# Altium PCB Monitor_Board.PcbDoc (part 5 of 5)
Units mil, origin at the board's own origin, x right, y up, seen from the top; angles counter-clockwise.
Board outline 3921.03 x 2556.03 mil, 4 copper layers (Top Layer, GND02, PWR03, Bottom Layer), stack 23.756 mil thick; 93 components, 142 nets, 522 pads, 264 vias.
Unrouted connection lines stored in the file: 39.
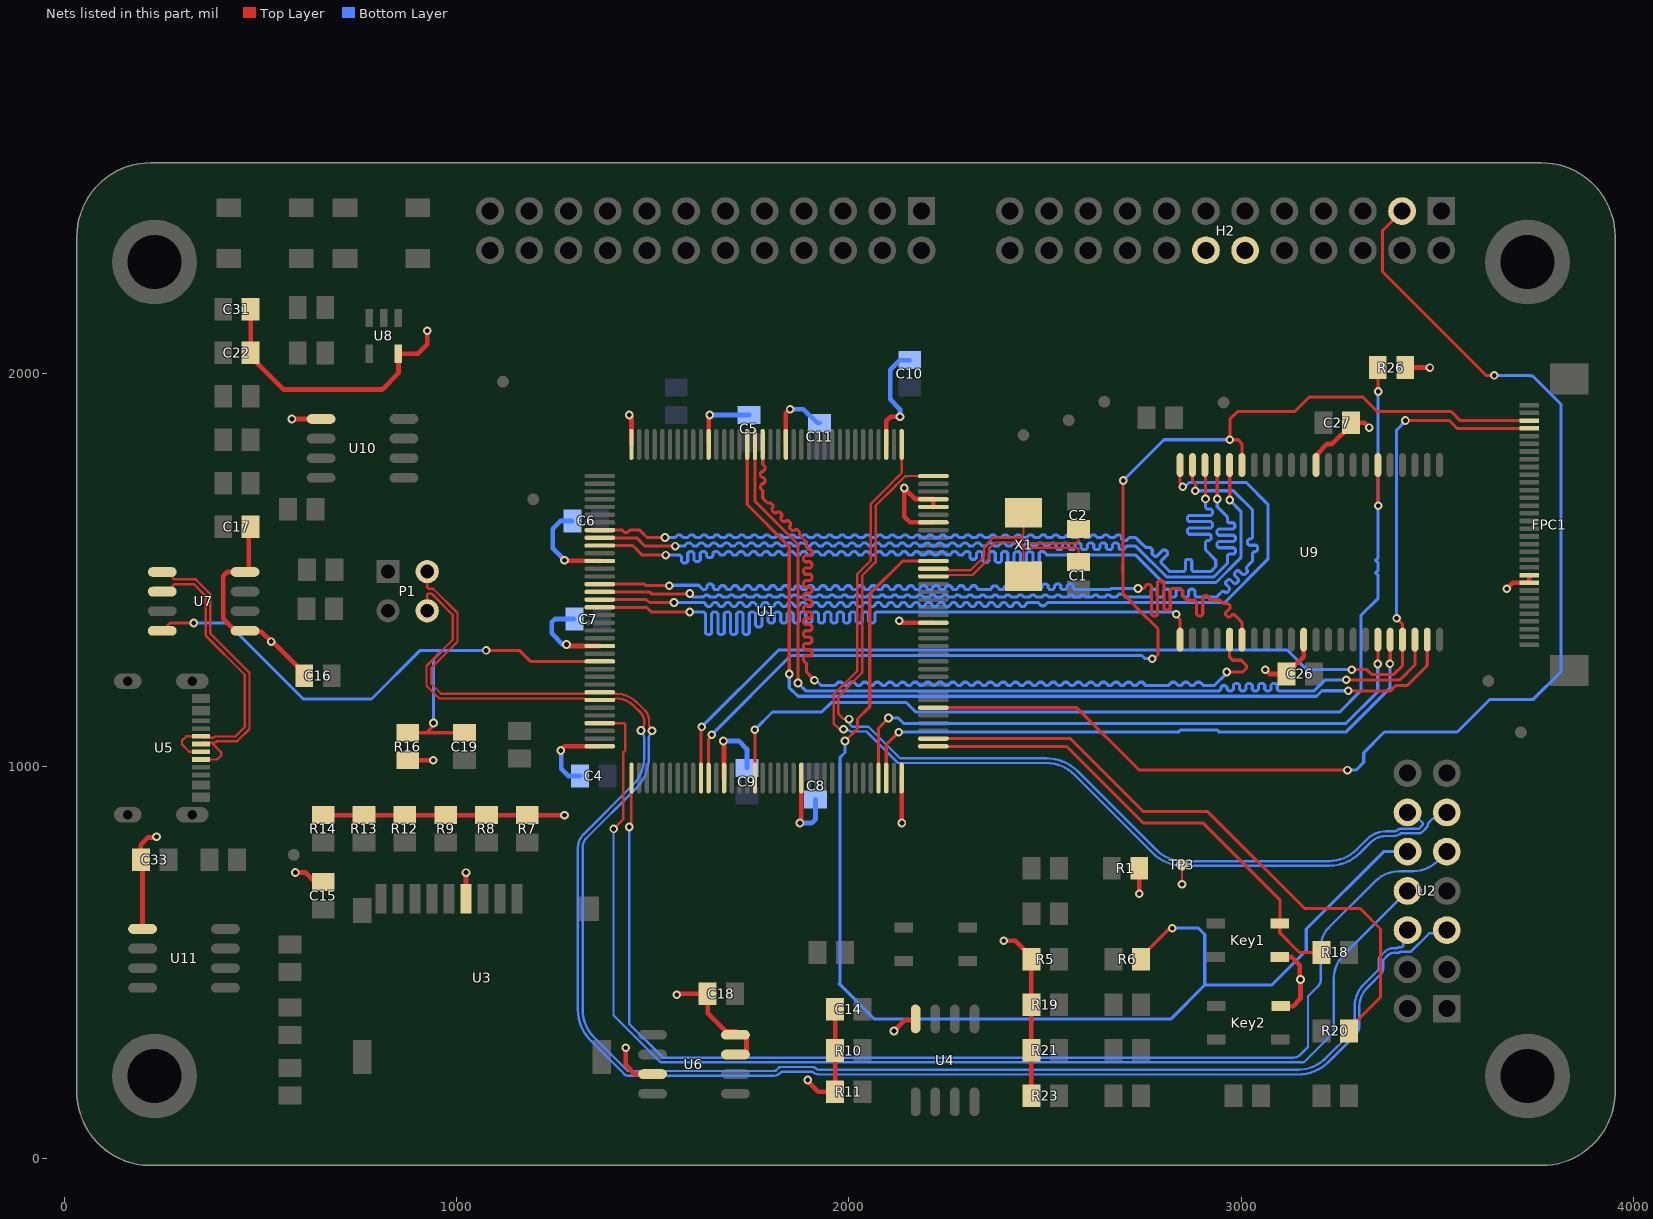
[diagram p6: the nets of this part, all layers, seen from the top]

## Via types
v1: diameter 22, hole 12, Top Layer to Bottom Layer, tented both sides, 259 vias
v2: diameter 45, hole 25, Top Layer to Bottom Layer, tented both sides, 4 vias
v3: diameter 22/22 (per signal layer), hole 12, Top Layer to Bottom Layer, tented both sides, 1 vias

## Nets (pads, with @x,y where several pads share a name; then routed paths per layer and width w, separated by ;. In a path a pad name is that pad's centre, name@x,y a point inside that pad or via, vN(x,y) a via of type N, cw(c..) or ccw(c..) an arc to the next point about the centre after c; other vN are vias at no path point) (continued)
SRAM_A9: U1.55 U9.27 | length 2443.5
  Top Layer w8: U1.55@1780.16,1820.2 1780.16,1775.76 1780.16,1769.45 1781.84,1767.76 1785.84,1763.76 1785.84,1755.76 1781.84,1751.76 1780.16,1751.76 1778.47,1751.76 1774.47,1747.76 1774.47,1739.76 1778.47,1735.76 1780.16,1735.76 1781.84,1735.76 1785.84,1731.76 1785.84,1723.76 1781.84,1719.76 1780.16,1719.76 1778.47,1719.76 1774.47,1715.76 1774.47,1707.76 1778.47,1703.76 1780.16,1702.07 1780.16,1687.76 1780.16,1683.16 1783.16,1680.16 1788,1675.32 1792.47,1670.86 1794.85,1670.86 1800.5,1670.86 1806.16,1665.2 1806.16,1659.54 1804.97,1658.35 1803.77,1657.16 1803.77,1651.5 1809.43,1645.84 1815.09,1645.84 1816.28,1647.04 1817.47,1648.23 1823.13,1648.23 1828.79,1642.57 1828.79,1636.92 1827.6,1635.73 1826.4,1634.53 1826.4,1628.87 1832.06,1623.22 1837.72,1623.22 1838.91,1624.41 1840.1,1625.6 1845.76,1625.6 1851.41,1619.95 1851.41,1614.29 1850.23,1613.1 1849.03,1611.9 1849.03,1606.25 1854.69,1600.59 1860.34,1600.59 1861.54,1601.79 1862.73,1602.97 1868.39,1602.97 1874.04,1597.32 1874.04,1591.66 1874.04,1589.28 1884.17,1579.16 1892,1571.32 1892,1569 1892,1561 1892,1557 1896,1553 1901.5,1553 1905.5,1549 1905.5,1541 1901.5,1537 1892,1537 1888,1537 1884,1533 1884,1525 1888,1521 1892,1521 1901.5,1521 1905.5,1517 1905.5,1509 1901.5,1505 1892,1505 1888,1505 1884,1501 1884,1493 1888,1489 1892,1489 1901.5,1489 1905.5,1485 1905.5,1477 1901.5,1473 1892,1473 1888,1473 1884,1469 1884,1461 1888,1457 1892,1457 1901.5,1457 1905.5,1453 1905.5,1445 1901.5,1441 1892,1441 1888,1441 1884,1437 1884,1429 1888,1425 1892,1425 1901.5,1425 1905.5,1421 1905.5,1413 1901.5,1409 1892,1409 1888,1409 1884,1405 1884,1397 1888,1393 1892,1393 1901.5,1393 1905.5,1389 1905.5,1381 1901.5,1377 1892,1377 1888,1377 1884,1373 1884,1365 1888,1361 1892,1361 1901.5,1361 1905.5,1357 1905.5,1349 1901.5,1345 1892,1345 1888,1345 1884,1341 1884,1333 1888,1329 1892,1329 1901.5,1329 1905.5,1325 1905.5,1317 1901.5,1313 1892,1313 1888,1313 1884,1309 1884,1301 1888,1297 1892,1297 1901.5,1297 1905.5,1293 1905.5,1285 1901.5,1281 1892,1281 1888,1281 1884,1277 1884,1269 1888,1265 1892,1261 1892,1249 1892,1246 1892,1239 v1(1912,1219) ; v1(2963,1240) 3004,1240 3013,1249 3013,1257 3000,1270 2978,1270 2970.28,1277.72 U9.27@2970.28,1322.34
  Bottom Layer w8: v1(1912,1219) 1915.79,1219 1928.79,1206 1936.79,1206 1952.79,1206 1964.79,1206 1968.79,1210 1972.79,1214 1980.79,1214 1984.79,1210 1988.79,1206 1996.79,1206 2000.79,1210 2004.79,1214 2012.79,1214 2016.79,1210 2020.79,1206 2028.79,1206 2032.79,1210 2036.79,1214 2044.79,1214 2048.79,1210 2052.79,1206 2060.79,1206 2064.79,1210 2068.79,1214 2076.79,1214 2080.79,1210 2084.79,1206 2092.79,1206 2096.79,1210 2100.79,1214 2108.79,1214 2112.79,1210 2116.79,1206 2124.79,1206 2128.79,1210 2132.79,1214 2140.79,1214 2144.79,1210 2148.79,1206 2156.79,1206 2160.79,1210 2164.79,1214 2172.79,1214 2176.79,1210 2180.79,1206 2188.79,1206 2192.79,1210 2196.79,1214 2204.79,1214 2208.79,1210 2212.79,1206 2220.79,1206 2224.79,1210 2228.79,1214 2236.79,1214 2240.79,1210 2244.79,1206 2252.79,1206 2256.79,1210 2260.79,1214 2268.79,1214 2272.79,1210 2276.79,1206 2284.79,1206 2288.79,1210 2292.79,1214 2300.79,1214 2304.79,1210 2308.79,1206 2316.79,1206 2320.79,1210 2324.79,1214 2332.79,1214 2336.79,1210 2340.79,1206 2348.79,1206 2352.79,1210 2356.79,1214 2364.79,1214 2368.79,1210 2372.79,1206 2380.79,1206 2384.79,1210 2388.79,1214 2396.79,1214 2400.79,1210 2404.79,1206 2412.79,1206 2416.79,1210 2420.79,1214 2428.79,1214 2432.79,1210 2436.79,1206 2444.79,1206 2448.79,1210 2452.79,1214 2460.79,1214 2464.79,1210 2468.79,1206 2476.79,1206 2480.79,1210 2484.79,1214 2492.79,1214 2496.79,1210 2500.79,1206 2508.79,1206 2512.79,1210 2516.79,1214 2524.79,1214 2528.79,1210 2532.79,1206 2540.79,1206 2544.79,1210 2548.79,1214 2556.79,1214 2560.79,1210 2564.79,1206 2572.79,1206 2576.79,1210 2580.79,1214 2588.79,1214 2592.79,1210 2596.79,1206 2604.79,1206 2608.79,1210 2612.79,1214 2620.79,1214 2624.79,1210 2628.79,1206 2636.79,1206 2640.79,1210 2644.79,1214 2652.79,1214 2656.79,1210 2660.79,1206 2668.79,1206 2672.79,1210 2676.79,1214 2684.79,1214 2688.79,1210 2692.79,1206 2700.79,1206 2704.79,1210 2708.79,1214 2716.79,1214 2720.79,1210 2724.79,1206 2732.79,1206 2736.79,1210 2740.79,1214 2748.79,1214 2752.79,1210 2752.79,1208.21 2755,1206 2767,1206 2775,1206 2779,1206 2787,1206 2803,1206 2815,1206 2819,1210 2823,1214 2831,1214 2835,1210 2839,1206 2847,1206 2851,1210 2855,1214 2863,1214 2867,1210 2871,1206 2879,1206 2883,1210 2887,1214 2895,1214 2899,1210 2903,1206 2915,1206 2928,1206 2932,1206 2963,1237 v1(2963,1240) ; v1@1913.68,1212.32 v1@1916.18,1214.82
SRAM_A10: U1.56 U9.42 | length 2455.3
  Top Layer w8: U1.56@1760.47,1820.2 1760.47,1675.01 1870,1565.48 v1(1870,1212) ; v1(3268,1220) 3404.8,1220 3419.22,1234.42 3424.87,1240.08 ; 3424.88,1240.08 3442.72,1257.92 U9.42@3442.72,1322.34
  Bottom Layer w8: v1(1870,1212) 1890,1192 2940,1192 2944,1192 2948,1196 2948,1200.95 2952,1204.95 2960,1204.95 2964,1200.95 2964,1196 2968,1192 2976,1192 2980,1196 2980,1206.74 2984,1210.74 2992,1210.74 2996,1206.74 2996,1196 3000,1192 3008,1192 3012,1196 3012,1206.74 3016,1210.74 3024,1210.74 3028,1206.74 3028,1196 3032,1192 3040,1192 3044,1196 3044,1206.74 3048,1210.74 3056,1210.74 3060,1206.74 3060,1196 3064,1192 3072,1192 3076,1196 3076,1206.74 3080,1210.74 3088,1210.74 3092,1206.74 3092,1196 3096,1192 3100.6,1192 3186,1192 3214,1220 v1(3268,1220)
SRAM_A11: U1.57 U9.43 | length 2403.4
  Top Layer w8: U1.57@1740.79,1820.2 1740.79,1666.86 1848,1559.65 v1(1848,1235) ; v1@3272.5,1195.5 v1@3276,1192 ; v1(3273,1192) v1@3276,1192 ; U9.43@3474.21,1322.34 3474.21,1256.51 3423.7,1206 3394.7,1206 3380.7,1192 v1@3276,1192
  Bottom Layer w8: v1(1848,1235) 1848,1200 1870,1178 3191.8,1178 3205.97,1192.18 3272.82,1192.18 v1(3273,1192)
SRAM_A12: U1.87 U9.28 | length 2475
  Top Layer w8: U1.87@1364.8,1463.9 1478.32,1463.9 1481.64,1460.58 1542,1460.58 v1(1542,1460) ; v1(2737,1453) 2747,1453 2751,1453 2755,1457 2755,1459.11 2759,1463.11 2767,1463.11 2771,1459.11 2771,1453 2771,1386.8 2775,1382.8 2783,1382.8 2787,1386.8 2787,1453 2787,1468.6 2791,1472.6 2799,1472.6 2803,1468.6 2803,1453 2803,1401.69 2807,1397.69 2815,1397.69 2819,1401.69 2819,1449 2823,1453 2835,1453 2836,1453 2843.8,1453 2852,1444.8 2852,1433 2862,1423 2870,1423 2882,1423 2886,1419 2886,1386.78 2890,1382.78 2898,1382.78 2902,1386.78 2902,1423 2902,1430.8 2906,1434.8 2914,1434.8 2918,1430.8 2918,1427 2922,1423 2934,1423 2937,1423 2945.77,1423 2951.77,1417 2954.6,1414.17 2960.26,1414.17 2965.91,1414.17 2971.57,1408.51 2971.57,1402.86 2968.74,1400.03 2960.07,1391.36 2960.07,1385.7 2965.73,1380.05 2971.39,1380.05 2977.23,1385.89 2982.88,1385.89 2990.39,1378.39 3001.77,1367 U9.28@3001.77,1322.34
  Bottom Layer w8: v1(1542,1460) 1543,1461 1617,1461 1629,1449 1630,1450 1634,1450 1638,1454 1638,1460 1642,1464 1650,1464 1654,1460 1654,1454 1658,1450 1666,1450 1670,1454 1670,1455.9 1674,1459.9 1682,1459.9 1686,1455.9 1686,1454 1690,1450 1698,1450 1702,1454 1702,1455.9 1706,1459.9 1714,1459.9 1718,1455.9 1718,1454 1722,1450 1730,1450 1734,1454 1734,1455.9 1738,1459.9 1746,1459.9 1750,1455.9 1750,1454 1754,1450 1762,1450 1766,1454 1766,1455.9 1770,1459.9 1778,1459.9 1782,1455.9 1782,1454 1786,1450 1794,1450 1798,1454 1798,1455.9 1802,1459.9 1810,1459.9 1814,1455.9 1814,1454 1818,1450 1826,1450 1830,1454 1830,1455.9 1834,1459.9 1842,1459.9 1846,1455.9 1846,1454 1850,1450 1858,1450 1862,1454 1862,1455.9 1866,1459.9 1874,1459.9 1878,1455.9 1878,1454 1882,1450 1890,1450 1894,1454 1894,1455.9 1898,1459.9 1906,1459.9 1910,1455.9 1910,1454 1914,1450 1922,1450 1926,1454 1926,1455.9 1930,1459.9 1938,1459.9 1942,1455.9 1942,1454 1946,1450 1954,1450 1958,1454 1958,1455.9 1962,1459.9 1970,1459.9 1974,1455.9 1974,1454 1978,1450 1986,1450 1990,1454 1990,1455.9 1994,1459.9 2002,1459.9 2006,1455.9 2006,1454 2010,1450 2018,1450 2022,1454 2022,1455.9 2026,1459.9 2034,1459.9 2038,1455.9 2038,1454 2042,1450 2050,1450 2054,1454 2054,1455.9 2058,1459.9 2066,1459.9 2070,1455.9 2070,1454 2074,1450 2082,1450 2086,1454 2086,1455.9 2090,1459.9 2098,1459.9 2102,1455.9 2102,1454 2106,1450 2114,1450 2118,1454 2118,1455.9 2122,1459.9 2130,1459.9 2134,1455.9 2134,1454 2138,1450 2146,1450 2150,1454 2150,1455.9 2154,1459.9 2162,1459.9 2166,1455.9 2166,1454 2170,1450 2178,1450 2182,1454 2182,1455.9 2186,1459.9 2194,1459.9 2198,1455.9 2198,1454 2202,1450 2210,1450 2214,1454 2214,1455.9 2218,1459.9 2226,1459.9 2230,1455.9 2230,1454 2234,1450 2242,1450 2246,1454 2246,1455.9 2250,1459.9 2258,1459.9 2262,1455.9 2262,1454 2266,1450 2274,1450 2278,1454 2278,1455.9 2282,1459.9 2290,1459.9 2294,1455.9 2294,1454 2298,1450 2306,1450 2310,1454 2310,1455.9 2314,1459.9 2322,1459.9 2326,1455.9 2326,1454 2330,1450 2342,1450 2356,1450 2360,1450 2364,1454 2364,1455.57 2368,1459.57 2376,1459.57 2380,1455.57 2380,1454 2384,1450 2392,1450 2396,1454 2396,1455.57 2400,1459.57 2408,1459.57 2412,1455.57 2412,1454 2416,1450 2424,1450 2428,1454 2428,1455.57 2432,1459.57 2440,1459.57 2444,1455.57 2444,1454 2448,1450 2456,1450 2460,1454 2460,1455.57 2464,1459.57 2472,1459.57 2476,1455.57 2476,1454 2480,1450 2488,1450 2492,1454 2492,1460 2496,1464 2504,1464 2508,1460 2508,1454 2512,1450 2520,1450 2524,1454 2524,1460 2528,1464 2536,1464 2540,1460 2540,1454 2544,1450 2552,1450 2556,1454 2556,1460 2560,1464 2568,1464 2572,1460 2572,1454 2576,1450 2588,1450 2604,1450 2618,1450 2665,1450 2668,1453 v1@2735,1453
SRAM_A13: U1.88 U9.21 | length 2457.2
  Top Layer w8: U1.88@1364.8,1444.21 1491,1444.21 1496.21,1439 1593,1439 v1(1594,1440) ; U9.21@2875.79,1767.66 2874.9,1766.76 2875.79,1765.87 2875.79,1728.21 2883,1721 v1(2883,1702)
  Bottom Layer w8: v1(1594,1440) 1603,1431 1621,1431 1628.42,1431 1629,1431.58 1633,1435.58 1641,1435.58 1645,1431.58 1645.58,1431 1660,1431 1661,1432 1665,1436 1673,1436 1677,1432 1678,1431 1692,1431 1693,1432 1697,1436 1705,1436 1709,1432 1710,1431 1724,1431 1725,1432 1729,1436 1737,1436 1741,1432 1742,1431 1756,1431 1757,1432 1761,1436 1769,1436 1773,1432 1774,1431 1788,1431 1789,1432 1793,1436 1801,1436 1805,1432 1806,1431 1820,1431 1821,1432 1825,1436 1833,1436 1837,1432 1838,1431 1852,1431 1853,1432 1857,1436 1865,1436 1869,1432 1870,1431 1884,1431 1885,1432 1889,1436 1897,1436 1901,1432 1902,1431 1916,1431 1917,1432 1921,1436 1929,1436 1933,1432 1934,1431 1948,1431 1949,1432 1953,1436 1961,1436 1965,1432 1966,1431 1980,1431 1981,1432 1985,1436 1993,1436 1997,1432 1998,1431 2012,1431 2013,1432 2017,1436 2025,1436 2029,1432 2030,1431 2044,1431 2045,1432 2049,1436 2057,1436 2061,1432 2062,1431 2076,1431 2077,1432 2081,1436 2089,1436 2093,1432 2094,1431 2108,1431 2109,1432 2113,1436 2121,1436 2125,1432 2126,1431 2140,1431 2141,1432 2145,1436 2153,1436 2157,1432 2158,1431 2172,1431 2173,1432 2177,1436 2185,1436 2189,1432 2190,1431 2204,1431 2205,1432 2209,1436 2217,1436 2221,1432 2222,1431 2236,1431 2237,1432 2241,1436 2249,1436 2253,1432 2254,1431 2268,1431 2269,1432 2273,1436 2281,1436 2285,1432 2286,1431 2300,1431 2301,1432 2305,1436 2313,1436 2317,1432 2318,1431 2332,1431 2333,1432 2337,1436 2345,1436 2349,1432 2350,1431 2364,1431 2365,1432 2369,1436 2377,1436 2381,1432 2382,1431 2396,1431 2397,1432 2401,1436 2409,1436 2413,1432 2414,1431 2428,1431 2429,1432 2433,1436 2441,1436 2445,1432 2446,1431 2460,1431 2461,1432 2465,1436 2473,1436 2477,1432 2478,1431 2492,1431 2493,1432 2497,1436 2505,1436 2509,1432 2510,1431 2524,1431 2525,1432 2529,1436 2537,1436 2541,1432 2542,1431 2556,1431 2557,1432 2561,1436 2569,1436 2573,1432 2574,1431 2588,1431 2589,1432 2593,1436 2601,1436 2605,1432 2606,1431 2620,1431 2621,1432 2625,1436 2633,1436 2637,1432 2638,1431 2652,1431 2653,1432 2657,1436 2665,1436 2669,1432 2670,1431 2681,1431 2685,1435 2689,1439 2697,1439 2701,1435 2705,1431 2717,1431 2729,1431 2762,1431 2766,1431 2770,1435 2770,1447 2774,1451 2782,1451 2786,1447 2786,1435 2790,1431 2798,1431 2802,1435 2802,1447 2806,1451 2814,1451 2818,1447 2818,1435 2822,1431 2830,1431 2834,1435 2834,1447 2838,1451 2846,1451 2850,1447 2850,1435 2854,1431 2862,1431 2866,1435 2866,1447 2870,1451 2878,1451 2882,1447 2882,1434.6 2885.6,1431 2937,1431 2942.66,1436.66 2951.14,1445.14 2956.8,1445.14 2958.74,1443.2 2964.4,1443.2 2970.06,1448.85 2970.06,1454.51 2965.28,1459.28 2960.51,1464.06 2960.51,1469.71 2966.17,1475.37 2971.82,1475.37 2976.6,1470.6 2981.37,1465.82 2987.03,1465.82 2992.68,1471.48 2992.68,1477.14 2987.91,1481.91 2983.14,1486.68 2983.14,1492.34 2988.8,1498 2994.45,1498 2999.23,1493.23 3004,1488.45 3009.66,1488.45 3015.31,1494.11 3015.31,1499.77 3013.37,1501.71 3013.37,1507.37 3021.5,1515.5 3029,1523 3029,1531 3029,1543 3033,1547 3037.9,1547 3041.9,1551 3041.9,1559 3037.9,1563 3029,1563 3020.1,1563 3016.1,1567 3016.1,1575 3020.1,1579 3025,1579 3029,1583 3029,1589 3029,1653 2980,1702 2917.7,1702 2917.51,1702.19 2900.11,1702.19 2899.92,1702 v1(2883,1702)
SRAM_A14: U1.89 U9.22 | length 2480.7
  Top Layer w8: U1.89@1364.8,1424.53 1484,1424.53 1491.53,1417 v1(1554,1417) ; U9.22@2843.65,1767.01 U9.22@2844.29,1767.66 2844.29,1722.3 2850.8,1715.79 v1(2850.8,1712)
  Bottom Layer w8: v1(1554,1417) 1611,1417 1619,1417 1631,1417 1635,1413 1635,1411 1639,1407 1647,1407 1651,1411 1651,1413 1655,1417 1663,1417 1667,1413 1667,1411 1671,1407 1679,1407 1683,1411 1683,1413 1687,1417 1695,1417 1699,1413 1699,1411 1703,1407 1711,1407 1715,1411 1715,1413 1719,1417 1727,1417 1731,1413 1731,1411 1735,1407 1743,1407 1747,1411 1747,1413 1751,1417 1759,1417 1763,1413 1763,1411 1767,1407 1775,1407 1779,1411 1779,1413 1783,1417 1791,1417 1795,1413 1795,1411 1799,1407 1807,1407 1811,1411 1811,1413 1815,1417 1823,1417 1827,1413 1827,1411 1831,1407 1839,1407 1843,1411 1843,1413 1847,1417 1855,1417 1859,1413 1859,1411 1863,1407 1871,1407 1875,1411 1875,1413 1879,1417 1887,1417 1891,1413 1891,1411 1895,1407 1903,1407 1907,1411 1907,1413 1911,1417 1919,1417 1923,1413 1923,1411 1927,1407 1935,1407 1939,1411 1939,1413 1943,1417 1951,1417 1955,1413 1955,1411 1959,1407 1967,1407 1971,1411 1971,1413 1975,1417 1983,1417 1987,1413 1987,1411 1991,1407 1999,1407 2003,1411 2003,1413 2007,1417 2015,1417 2019,1413 2019,1411 2023,1407 2031,1407 2035,1411 2035,1413 2039,1417 2047,1417 2051,1413 2051,1411 2055,1407 2063,1407 2067,1411 2067,1413 2071,1417 2079,1417 2083,1413 2083,1411 2087,1407 2095,1407 2099,1411 2099,1413 2103,1417 2111,1417 2115,1413 2115,1411 2119,1407 2127,1407 2131,1411 2131,1413 2135,1417 2143,1417 2147,1413 2147,1411 2151,1407 2159,1407 2163,1411 2163,1413 2167,1417 2175,1417 2179,1413 2179,1411 2183,1407 2191,1407 2195,1411 2195,1413 2199,1417 2207,1417 2211,1413 2211,1411 2215,1407 2223,1407 2227,1411 2227,1413 2231,1417 2239,1417 2243,1413 2243,1411 2247,1407 2255,1407 2259,1411 2259,1413 2263,1417 2271,1417 2275,1413 2275,1411 2279,1407 2287,1407 2291,1411 2291,1413 2295,1417 2303,1417 2307,1413 2307,1411 2311,1407 2319,1407 2323,1411 2323,1413 2327,1417 2335,1417 2339,1413 2339,1411 2343,1407 2351,1407 2355,1411 2355,1413 2359,1417 2367,1417 2371,1413 2371,1411 2375,1407 2383,1407 2387,1411 2387,1413 2391,1417 2399,1417 2403,1413 2403,1411 2407,1407 2415,1407 2419,1411 2419,1413 2423,1417 2431,1417 2435,1413 2435,1411 2439,1407 2447,1407 2451,1411 2451,1413 2455,1417 2462.5,1417 2470.5,1417 2482.5,1417 2486.5,1413 2490.5,1409 2498.5,1409 2502.5,1413 2506.5,1417 2517,1417 2958,1417 3068,1527 3068,1668 3013,1723 2867.42,1723 2855.24,1710.82 2854.06,1712 v1(2850.8,1712)
SRAM_A15: U1.90 U9.23 | length 2455.3
  Top Layer w8: U1.90@1364.8,1404.84 1483.89,1404.84 1495.73,1393 v1(1594,1393) ; v1(2834,1387) 2834,1383.21 2844.29,1372.92 U9.23@2844.29,1322.34
  Bottom Layer w8: v1(1594,1393) 1610,1393 1618,1393 1630,1393 1634,1389 1634,1339.84 1638,1335.84 1646,1335.84 1650,1339.84 1650,1389 1654,1393 1662,1393 1666,1389 1666,1339.84 1670,1335.84 1678,1335.84 1682,1339.84 1682,1389 1686,1393 1694,1393 1698,1389 1698,1339.84 1702,1335.84 1710,1335.84 1714,1339.84 1714,1389 1718,1393 1726,1393 1730,1389 1730,1339.84 1734,1335.84 1742,1335.84 1746,1339.84 1746,1389 1750,1393 1758,1393 1762,1389 1762,1358.63 1766,1354.63 1774,1354.63 1778,1358.63 1778,1389 1782,1393 1790,1393 1794,1389 1794,1368.84 1798,1364.84 1806,1364.84 1810,1368.84 1810,1389 1814,1393 1822,1393 1826,1389 1826,1368.84 1830,1364.84 1838,1364.84 1842,1368.84 1842,1389 1846,1393 1854,1393 1858,1389 1858,1368.84 1862,1364.84 1870,1364.84 1874,1368.84 1874,1389 1878,1393 1886,1393 1890,1389 1890,1368.84 1894,1364.84 1902,1364.84 1906,1368.84 1906,1389 1910,1393 1918,1393 1922,1389 1922,1368.84 1926,1364.84 1934,1364.84 1938,1368.84 1938,1389 1942,1393 1950,1393 1954,1389 1954,1368.84 1958,1364.84 1966,1364.84 1970,1368.84 1970,1389 1974,1393 1982,1393 1986,1389 1986,1368.84 1990,1364.84 1998,1364.84 2002,1368.84 2002,1389 2006,1393 2014,1393 2018,1389 2018,1368.84 2022,1364.84 2030,1364.84 2034,1368.84 2034,1389 2038,1393 2046,1393 2050,1389 2050,1368.84 2054,1364.84 2062,1364.84 2066,1368.84 2066,1389 2070,1393 2828,1393 v1(2834,1387)
SRAM_A16: U1.80 U9.20 | length 2456.4
  Top Layer w8: U1.80@1364.8,1601.69 1399.65,1601.69 1407.65,1601.69 1421.96,1601.69 1423.65,1600.01 1427.65,1596.01 1435.65,1596.01 1439.65,1600.01 1441.33,1601.69 1455.65,1601.69 1466.68,1601.69 1469.19,1599.19 1485.37,1583 v1(1531,1583) ; U9.20@2907.28,1767.66 2908.64,1766.3 2908.64,1681.36 v1(2908.81,1681.19)
  Bottom Layer w8: v1(1531,1583) 1551,1583 1556.78,1583 1559,1585.22 1563,1589.22 1571,1589.22 1575,1585.22 1577.22,1583 1588.85,1583 1591,1585.15 1595,1589.15 1603,1589.15 1607,1585.15 1609.15,1583 1620.85,1583 1623,1585.15 1627,1589.15 1635,1589.15 1639,1585.15 1641.15,1583 1652.85,1583 1655,1585.15 1659,1589.15 1667,1589.15 1671,1585.15 1673.15,1583 1684.85,1583 1687,1585.15 1691,1589.15 1699,1589.15 1703,1585.15 1705.15,1583 1716.85,1583 1719,1585.15 1723,1589.15 1731,1589.15 1735,1585.15 1737.15,1583 1748.85,1583 1751,1585.15 1755,1589.15 1763,1589.15 1767,1585.15 1769.15,1583 1780.85,1583 1783,1585.15 1787,1589.15 1795,1589.15 1799,1585.15 1801.15,1583 1812.85,1583 1815,1585.15 1819,1589.15 1827,1589.15 1831,1585.15 1833.15,1583 1844.85,1583 1847,1585.15 1851,1589.15 1859,1589.15 1863,1585.15 1865.15,1583 1876.85,1583 1879,1585.15 1883,1589.15 1891,1589.15 1895,1585.15 1897.15,1583 1908.85,1583 1911,1585.15 1915,1589.15 1923,1589.15 1927,1585.15 1929.15,1583 1940.85,1583 1943,1585.15 1947,1589.15 1955,1589.15 1959,1585.15 1961.15,1583 1972.85,1583 1975,1585.15 1979,1589.15 1987,1589.15 1991,1585.15 1993.15,1583 2004.85,1583 2007,1585.15 2011,1589.15 2019,1589.15 2023,1585.15 2025.15,1583 2036.85,1583 2039,1585.15 2043,1589.15 2051,1589.15 2055,1585.15 2057.15,1583 2068.85,1583 2071,1585.15 2075,1589.15 2083,1589.15 2087,1585.15 2089.15,1583 2100.85,1583 2103,1585.15 2107,1589.15 2115,1589.15 2119,1585.15 2121.15,1583 2132.85,1583 2135,1585.15 2139,1589.15 2147,1589.15 2151,1585.15 2153.15,1583 2164.85,1583 2167,1585.15 2171,1589.15 2179,1589.15 2183,1585.15 2185.15,1583 2196.85,1583 2199,1585.15 2203,1589.15 2211,1589.15 2215,1585.15 2217.15,1583 2228.85,1583 2231,1585.15 2235,1589.15 2243,1589.15 2247,1585.15 2249.15,1583 2260.85,1583 2263,1585.15 2267,1589.15 2275,1589.15 2279,1585.15 2281.15,1583 2292.85,1583 2295,1585.15 2299,1589.15 2307,1589.15 2311,1585.15 2313.15,1583 2324.85,1583 2327,1585.15 2331,1589.15 2339,1589.15 2343,1585.15 2345.15,1583 2356.85,1583 2359,1585.15 2363,1589.15 2371,1589.15 2375,1585.15 2377.15,1583 2388.85,1583 2391,1585.15 2395,1589.15 2403,1589.15 2407,1585.15 2409.15,1583 2420.85,1583 2423,1585.15 2427,1589.15 2435,1589.15 2439,1585.15 2441.15,1583 2452.85,1583 2455,1585.15 2459,1589.15 2467,1589.15 2471,1585.15 2473.15,1583 2484.85,1583 2487,1585.15 2491,1589.15 2499,1589.15 2503,1585.15 2505.15,1583 2516.85,1583 2519,1585.15 2523,1589.15 2531,1589.15 2535,1585.15 2537.15,1583 2548.85,1583 2551,1585.15 2555,1589.15 2563,1589.15 2567,1585.15 2569.15,1583 2580.85,1583 2583,1585.15 2587,1589.15 2595,1589.15 2599,1585.15 2601.15,1583 2612.85,1583 2615,1585.15 2619,1589.15 2627,1589.15 2631,1585.15 2633.15,1583 2644.85,1583 2647,1585.15 2651,1589.15 2659,1589.15 2663,1585.15 2665.15,1583 2676.85,1583 2679,1585.15 2683,1589.15 2691,1589.15 2695,1585.15 2695,1583 2695,1578.96 2699,1574.96 2707,1574.96 2711,1578.96 ; 2711,1579 2715,1583 2720,1583 2730.75,1583 2736.4,1577.34 2747.72,1566.03 2756.2,1557.54 2761.86,1557.54 2761.98,1557.67 2767.64,1557.67 2773.3,1552.01 2773.3,1546.35 2773.17,1546.23 2773.17,1540.57 2778.83,1534.92 2784.49,1534.92 2800.91,1551.34 2806.57,1551.34 2812.23,1545.69 2812.23,1540.03 2795.8,1523.6 2795.8,1517.95 2804.29,1509.46 2810.67,1503.07 2817.75,1496 2825.75,1496 2841.75,1496 2853.75,1496 2857.75,1500 2857.75,1523.23 2861.75,1527.23 2869.75,1527.23 2873.75,1523.23 2873.75,1500 2877.75,1496 2889.75,1496 2905.75,1496 2910,1496 2922,1496 2935,1509 2935,1525 2908.81,1551.19 2908.81,1559.19 2908.81,1571.19 2912.81,1575.19 2919.14,1575.19 2923.14,1579.19 2923.14,1587.19 2919.14,1591.19 2908.81,1591.19 2867.14,1591.19 2863.14,1595.19 2863.14,1603.19 2867.14,1607.19 2908.81,1607.19 2922.85,1607.19 2926.85,1611.19 2926.85,1619.19 2922.85,1623.19 2908.81,1623.19 2867.14,1623.19 2863.14,1627.19 2863.14,1635.19 2867.14,1639.19 2908.81,1639.19 2922.87,1639.19 2926.87,1643.19 2926.87,1651.19 2922.87,1655.19 2912.81,1655.19 2908.81,1659.19 2908.81,1666 v1(2908.81,1681.19)
SRAM_A17: U1.81 U9.19 | length 2449.5
  Top Layer w8: U1.81@1364.8,1582.01 1458.99,1582.01 1480,1561 v1(1557,1561) ; U9.19@2938.78,1767.66 2938.78,1698.22 2939,1698 v1(2939,1681)
  Bottom Layer w8: v1(1557,1561) 1576,1561 1580,1561 1584,1565 1588,1569 1596,1569 1600,1565 1604,1561 1612,1561 1616,1565 1620,1569 1628,1569 1632,1565 1636,1561 1644,1561 1648,1565 1652,1569 1660,1569 1664,1565 1668,1561 1676,1561 1680,1565 1684,1569 1692,1569 1696,1565 1700,1561 1708,1561 1712,1565 1716,1569 1724,1569 1728,1565 1732,1561 1740,1561 1744,1565 1748,1569 1756,1569 1760,1565 1764,1561 1772,1561 1776,1565 1780,1569 1788,1569 1792,1565 1796,1561 1804,1561 1808,1565 1812,1569 1820,1569 1824,1565 1828,1561 1836,1561 1840,1565 1844,1569 1852,1569 1856,1565 1860,1561 1868,1561 1872,1565 1876,1569 1884,1569 1888,1565 1892,1561 1900,1561 1904,1565 1908,1569 1916,1569 1920,1565 1924,1561 1932,1561 1936,1565 1940,1569 1948,1569 1952,1565 1956,1561 1964,1561 1968,1565 1972,1569 1980,1569 1984,1565 1988,1561 1996,1561 2000,1565 2004,1569 2012,1569 2016,1565 2020,1561 2028,1561 2032,1565 2036,1569 2044,1569 2048,1565 2052,1561 2060,1561 2064,1565 2068,1569 2076,1569 2080,1565 2084,1561 2092,1561 2096,1565 2100,1569 2108,1569 2112,1565 2116,1561 2124,1561 2128,1565 2132,1569 2140,1569 2144,1565 2148,1561 2156,1561 2160,1565 2164,1569 2172,1569 2176,1565 2180,1561 2188,1561 2192,1565 2196,1569 2204,1569 2208,1565 2212,1561 2220,1561 2224,1565 2228,1569 2236,1569 2240,1565 2244,1561 2252,1561 2256,1565 2260,1569 2268,1569 2272,1565 2276,1561 2284,1561 2288,1565 2292,1569 2300,1569 2304,1565 2308,1561 2316,1561 2320,1565 2324,1569 2332,1569 2336,1565 2340,1561 2348,1561 2352,1565 2356,1569 2364,1569 2368,1565 2372,1561 2380,1561 2384,1565 2388,1569 2396,1569 2400,1565 2404,1561 2412,1561 2416,1565 2420,1569 2428,1569 2432,1565 2436,1561 2444,1561 2448,1565 2452,1569 2460,1569 2464,1565 2468,1561 2476,1561 2480,1565 2484,1569 2492,1569 2496,1565 2500,1561 2508,1561 2512,1565 2516,1569 2524,1569 2528,1565 2528,1561 2528,1556 2532,1552 2540,1552 2544,1556 2544,1561 2544,1565 2548,1569 2556,1569 2560,1565 2560,1561 2560,1556 2564,1552 2572,1552 2576,1556 2576,1561 2576,1565 2580,1569 2588,1569 2592,1565 2592,1561 2592,1556 2596,1552 2604,1552 2608,1556 2608,1561 2608,1565 2612,1569 2620,1569 2624,1565 2624,1561 2624,1556 2628,1552 2636,1552 2640,1556 2640,1561 2640,1565 2644,1569 2652,1569 2656,1565 2656,1561 2656,1556 2660,1552 2668,1552 2672,1556 2672,1561 2672,1565 2676,1569 2684,1569 2688,1565 2688,1561 2688,1556 2692,1552 2700,1552 2704,1556 2704,1557 2708,1561 2720,1561 2724,1561 2730.75,1561 2809.75,1482 2930,1482 2964.6,1516.6 2964.6,1524.6 2964.6,1536.6 2968.6,1540.6 2981,1540.6 2985,1544.6 2985,1552.6 2981,1556.6 2964.6,1556.6 2942.2,1556.6 2938.2,1560.6 2938.2,1568.6 2942.2,1572.6 2964.6,1572.6 2981,1572.6 2985,1576.6 2985,1584.6 2981,1588.6 2964.6,1588.6 2942.2,1588.6 2938.2,1592.6 2938.2,1600.6 2942.2,1604.6 2964.6,1604.6 2979.4,1604.6 2983.4,1608.6 2983.4,1616.6 2979.4,1620.6 2968.6,1620.6 2964.6,1624.6 2964.6,1635.4 2958.94,1641.06 2947.63,1652.37 2946.26,1653.74 2939,1661 v1(2939,1681)
SRAM_A18: U1.82 U9.18 | length 2469.9
  Top Layer w8: U1.82@1364.8,1562.32 1448.68,1562.32 1473,1538 v1(1533,1538) ; U9.18@2970.28,1767.66 2970.64,1767.3 v1(2970.64,1678.36)
  Bottom Layer w8: v1(1533,1538) 1549,1538 1557,1538 1569,1538 1573,1534 1573,1522.29 1577,1518.29 1585,1518.29 1589,1522.29 1589,1538 1589,1542.71 1593,1546.71 1601,1546.71 1605,1542.71 1605,1538 1605,1525.78 1609,1521.78 1617,1521.78 1621,1525.78 1621,1538 1621,1542.71 1625,1546.71 1633,1546.71 1637,1542.71 1637,1538 1637,1535.52 1641,1531.52 1649,1531.52 1653,1535.52 1653,1538 1653,1542.71 1657,1546.71 1665,1546.71 1669,1542.71 1669,1542 1673,1538 1681,1538 1685,1542 1685,1542.71 1689,1546.71 1697,1546.71 1701,1542.71 1701,1542 1705,1538 1713,1538 1717,1542 1717,1542.71 1721,1546.71 1729,1546.71 1733,1542.71 1733,1542 1737,1538 1745,1538 1749,1542 1749,1542.71 1753,1546.71 1761,1546.71 1765,1542.71 1765,1542 1769,1538 1777,1538 1781,1542 1781,1542.71 1785,1546.71 1793,1546.71 1797,1542.71 1797,1542 1801,1538 1809,1538 1813,1542 1813,1542.71 1817,1546.71 1825,1546.71 1829,1542.71 1829,1542 1833,1538 1841,1538 1845,1542 1845,1542.71 1849,1546.71 1857,1546.71 1861,1542.71 1861,1542 1865,1538 1873,1538 1877,1542 1877,1542.71 1881,1546.71 1889,1546.71 1893,1542.71 1893,1542 1897,1538 1905,1538 1909,1542 1909,1542.71 1913,1546.71 1921,1546.71 1925,1542.71 1925,1542 1929,1538 1937,1538 1941,1542 1941,1542.71 1945,1546.71 1953,1546.71 1957,1542.71 1957,1542 1961,1538 1969,1538 1973,1542 1973,1542.71 1977,1546.71 1985,1546.71 1989,1542.71 1989,1542 1993,1538 2001,1538 2005,1542 2005,1542.71 2009,1546.71 2017,1546.71 2021,1542.71 2021,1542 2025,1538 2033,1538 2037,1542 2037,1542.71 2041,1546.71 2049,1546.71 2053,1542.71 2053,1542 2057,1538 2065,1538 2069,1542 2069,1542.71 2073,1546.71 2081,1546.71 2085,1542.71 2085,1542 2089,1538 2097,1538 2101,1542 2101,1542.71 2105,1546.71 2113,1546.71 2117,1542.71 2117,1542 2121,1538 2129,1538 2133,1542 2133,1542.71 2137,1546.71 2145,1546.71 2149,1542.71 2149,1542 2153,1538 2161,1538 2165,1542 2165,1542.71 2169,1546.71 2177,1546.71 2181,1542.71 2181,1542 2185,1538 2193,1538 2197,1542 2197,1542.71 2201,1546.71 2209,1546.71 2213,1542.71 2213,1542 2217,1538 2225,1538 2229,1542 2229,1542.71 2233,1546.71 2241,1546.71 2245,1542.71 2245,1542 2249,1538 2257,1538 2261,1542 2261,1542.71 2265,1546.71 2273,1546.71 2277,1542.71 2277,1542 2281,1538 2289,1538 2293,1542 2293,1542.71 2297,1546.71 2305,1546.71 2309,1542.71 2309,1538 2309,1531.28 2313,1527.28 2321,1527.28 2325,1531.28 2325,1538 2325,1542.71 2329,1546.71 2337,1546.71 2341,1542.71 2341,1538 2341,1523.29 2345,1519.29 2353,1519.29 2357,1523.29 2357,1538 2357,1542.71 2361,1546.71 2369,1546.71 2373,1542.71 2373,1538 2373,1523.29 2377,1519.29 2385,1519.29 2389,1523.29 2389,1538 2389,1542.71 2393,1546.71 2401,1546.71 2405,1542.71 2405,1538 2405,1523.29 2409,1519.29 2417,1519.29 2421,1523.29 2421,1538 2421,1542.71 2425,1546.71 2433,1546.71 2437,1542.71 2437,1538 2437,1523.29 2441,1519.29 2449,1519.29 2453,1523.29 2453,1538 2453,1542.71 2457,1546.71 2465,1546.71 2469,1542.71 2469,1538 2469,1523.29 2473,1519.29 2481,1519.29 2485,1523.29 2485,1538 2485,1542.71 2489,1546.71 2497,1546.71 2501,1542.71 2501,1542 2505,1538 2517.83,1538 2730.75,1538 2799.75,1469 2802.95,1469 2803.95,1468 2935.8,1468 2999,1531.2 2999,1650 v1(2970.64,1678.36)
SRAM_NBL0: U1.141 U9.39 | length 1582.7
  Top Layer w8: U1.141@2075.43,969.8 2075.43,1096.57 2101,1122.14 v1(2101,1122.57) ; v1@3348,1260 v1(3348.23,1260.23) U9.39@3348.23,1322.34
  Bottom Layer w8: v1@2100.57,1122.57 v1(2101,1122.57) 2125.61,1122.57 2139.18,1109 3267,1109 3348,1190 3348,1260 v1(3348.23,1260.23)
SRAM_NBL1: U1.142 U9.40 | length 1556.8
  Top Layer w8: U1.142@2095.12,969.8 2095.12,1055.12 v1(2126.75,1086.75) ; v1(3379,1261) 3379.72,1261.72 U9.40@3379.72,1322.34
  Bottom Layer w8: v1(2126.75,1086.75) 2839.75,1086.75 2845,1092 2938.75,1092 2944,1086.75 3266.75,1086.75 3379,1199 v1(3379,1261)
SRAM_NE3: R26.1 U1.125 U9.6 | length 2687.8
  Top Layer w8: v1(1760,1093) 1760.47,1092.53 U1.125@1760.47,969.8 ; R26.1@3348,2016 3350,2014 3349,2013 v1(3349,1955) ; U9.6@3348.23,1767.66 3349,1766.89 v1(3349,1664)
  Bottom Layer w8: v1(1760,1093) 1805,1138 1931,1138 1955,1162 2146.76,1162 2170.76,1138 3251,1138 3305,1192 3305,1384 3349,1428 3349,1467 3349,1486.6 3342.8,1492.8 3349,1499 3349,1518.6 3342.8,1524.8 3349,1531 3349,1550.6 v1(3349,1664) 3350,1665 3349,1666 v1(3349,1955)
SRAM_NOE: FPC1.29 U1.118 U9.41 | length 2996.4
  Top Layer w8: U1.118@1622.68,969.8 1623.26,970.38 1623.26,1098.26 v1(1625,1100) ; v1(3282,1246) 3320,1246 3332,1234 3389,1234 3411.22,1256.22 U9.41@3411.22,1322.34 3411.22,1361.78 v1(3396,1377) ; v1(3418.5,1881) 3530,1881 3549.94,1861.07 FPC1.29@3734.31,1861.07
  Bottom Layer w8: v1(1625,1100) 1821,1296 3117,1296 3167,1246 v1(3282,1246) ; v1(3396,1377) 3396,1857 v1@3418.5,1879.5
SRAM_NWE: FPC1.30 U1.119 U9.17 | length 3095.9
  Top Layer w8: U1.119@1642.36,969.8 1642.36,1068.57 1650,1076.21 v1(1650,1080) ; v1@2699,1735 v1(2699,1728) 2699,1514.7 2698,1513.7 2698,1496.3 2699,1495.3 2699,1439 2757,1381 2769.2,1368.8 2788,1350 2788,1284 v1@2777,1273 ; U9.17@3001.77,1767.66 3001.77,1822.23 2992,1832 v1(2971,1832) 2971,1884 2991,1904 3136.8,1904 3173.8,1941 3310.2,1941 3347.2,1904 3535,1904 3558.26,1880.74 FPC1.30@3734.31,1880.74
  Bottom Layer w8: v1(1650,1080) 1852,1282 2747,1282 2755,1274 v1(2773,1274) ; v1(2699,1728) 2803,1832 v1(2971,1832)
SWD_RST: R6.2 U1.25 U2.10 | length 3252.4
  Top Layer w8: v1(1990,1064) 2021.69,1095.69 2021.69,1120.29 2053,1151.6 2053,1439 2136.95,1522.95 U1.25@2215.2,1522.95 ; R6.2@2745,508 2745,514.1 2815.22,584.32 2821.32,584.32 v3(2824,587)
  Bottom Layer w8: v1(1990,1064) 1990,1034.8 1977,1021.8 1977,447 1975,445 2065,355 2820,355 2907,442 ; v3(2824,587) 2891,587 2907,571 2907,442 ; U2.10@3424,782 3363,782 3165.71,584.71 3165.71,530.08 3077.63,442 2907,442
SWD_TCK: U1.109 U2.9 | length 3100.8
  Top Layer w6: v1(1440,845) 1445.51,850.51 U1.109@1445.51,969.8
  Bottom Layer w6: v1(1440,845) 1440,343 1526,257 3132,257 ccw(c3132,283.8) 3150.95,264.85 3170.35,284.25 3170.35,413.35 3196,439 ccw(c3179.1,455.9) 3203,455.9 3203,540 cw(c3270.6,540) 3217.83,582.25 cw(c3270.6,540) 3222.78,587.78 3342,707 cw(c3402.36,646.64) 3402.36,732 3438,732 ccw(c3438,818.91) 3499.44,757.44 U2.9@3524,782
SWD_TMS: U1.105 U2.8 | length 3172.9
  Top Layer w6: U1.105@1364.8,1109.57 1427.15,1109.57 1430,1106.72 1430,1040 1425,1035 1425,865 v1(1400,840)
  Bottom Layer w6: v1(1400,840) 1400,365 1520,245 3160,245 3236,321 3236,459 cw(c3320.5,459) 3260.72,518.72 U2.8@3424,682
SWITCH_0: Key1.3 R18.1 U1.1 | length 1257.3
  Top Layer w8: U1.1@2215.2,1050.51 2554.49,1050.51 2749.74,855.26 2901.74,855.26 3099.26,657.74 3099.26,599.64 Key1.3@3098.36,598.75 3098.36,574.88 3148.23,525 R18.1@3205,525
SWITCH_1: R20.2 U1.2 | length 1633.9
  Top Layer w8: U1.2@2215.2,1070.2 2564.8,1070.2 2751,884 2915,884 3162.03,636.97 3303.03,636.97 3355,585 3355,411.02 3275.08,331.1 R20.2@3275.08,325
UART2_N: U1.37 U2.11 | length 2541
  Top Layer w6: v1(1986,1094) 1976,1094 1961,1109 1961,1182.5 2021.52,1243.02 2021.52,1490.52 2056,1525 2056,1668.99 2109,1721.99 2109,1722.25 2127.75,1741 2128.01,1741 2134.49,1747.48 U1.37@2134.49,1820.2
  Bottom Layer w6: v1(1986,1094) 1988.29,1091.71 1999.99,1091.71 2003.51,1088.19 2044.84,1088.19 2125.03,1008 2503.58,1008 cw(c2503.58,908) 2574.29,978.71 2774.23,778.77 ccw(c2853.35,857.9) 2853.35,746 3223.64,746 ccw(c3223.64,857.86) 3302.73,778.76 3329.49,805.51 cw(c3369.28,765.72) 3369.28,822 3390.83,822 ccw(c3390.83,844.07) 3406.43,828.46 3406.49,828.51 3453.03,828.51 ccw(c3453.03,840.44) 3461.46,832.01 3470.76,841.3 ccw(c3458.1,853.96) 3476,853.96 ; 3476,854 3487.72,865.72 cw(c3489.8,863.63) 3489.8,866.58 ccw(c3489.8,869.54) 3491.89,867.44 3494.04,869.59 cw(c3524,839.62) U2.11@3524,882 U2.11@3519.64,882
UART2_P: U1.36 U2.12 | length 2487.7
  Top Layer w6: v1(2000,1120) 1986,1120 1973,1133 1973,1177.53 2033.52,1238.05 2033.52,1485.54 2068,1520.03 2068,1664.01 2121,1717.01 2121,1717.28 2132.72,1729 2132.99,1729 2142.99,1739 2150,1739 2150.49,1739.49 U1.36@2215.2,1739.49
  Bottom Layer w6: v1(2000,1120) 2002.48,1117.52 2002.48,1106.19 2008.48,1100.19 2049.81,1100.19 2130,1020 2503.63,1020 cw(c2503.63,908.13) 2582.74,987.23 2782.68,787.29 ccw(c2853.39,858) 2853.39,758 3223.58,758 ccw(c3223.58,858) 3294.29,787.29 3321.03,814.03 cw(c3369.24,765.82) 3369.24,834 3390.76,834 ccw(c3390.76,844.24) 3398,837 3398.04,837.04 cw(c3406.43,828.64) 3406.43,840.51 3453,840.51 3461,848.51 ccw(c3456.76,852.76) 3462.76,852.76 ccw(c3456.76,852.76) 3461,857 3444.49,873.51 ccw(c3424,853.03) U2.12@3424,882 U2.12@3424,869
UART_N: P1.4 U1.102 U2.5 | length 4263.3
  Top Layer w6: P1.4@925,1396 925,1436.49 928.51,1440 935.49,1440 990,1385.49 990,1321.97 923,1254.97 923,1205.03 955.56,1172.47 1325.74,1172.47 1329.58,1168.62 U1.102@1364.8,1168.62 1397.3,1168.62 ccw(c1397.3,1175.18) 1401.94,1170.54 cw(c1406.58,1165.9) 1406.58,1172.46 cw(c1406.58,1109.81) 1423.26,1170.2 cw(c1406.58,1109.81) 1450.89,1154.11 1469.67,1135.33 cw(c1448.97,1114.64) 1478.24,1114.64 1478.24,1108.34 cw(c1464.17,1108.34) 1474.12,1098.39 1472.32,1096.59 ccw(c1477.9,1091) v1(1470,1091)
  Bottom Layer w6: v1(1470,1091) ccw(c1479.07,1091) 1472.66,1084.59 cw(c1460.33,1072.27) 1477.76,1072.27 1477.76,1030.52 1478,1030.28 1478,1022.42 cw(c1378,1022.42) 1448.71,951.71 1323.06,826.06 ccw(c1356.99,792.12) 1309,792.12 1309,379.38 ccw(c1420.9,379.38) 1341.77,300.26 1427.51,214.51 ccw(c1436,223) 1436,211 1808.83,211 ccw(c1808.83,233.07) 1824.43,217.46 1827.97,221 1907.03,221 ; 1907.06,220.97 ccw(c1923.89,237.8) 1923.89,214 3144.4,214 ccw(c3144.4,325.86) 3223.5,246.76 3291.39,314.66 ccw(c3268.19,337.86) 3301,337.86 3301,386 cw(c3371.01,386) 3321.51,435.51 3329.51,443.51 ; 3329.51,443.54 3354.51,468.54 ccw(c3336.42,486.62) 3362,486.62 3362,506 3374.34,518.34 cw(c3388,504.69) 3388,524 3403.16,524 3405.6,526.43 3431.75,526.43 3479.57,574.25 3516.25,574.25 U2.5@3524,582
UART_P: P1.2 U1.101 U2.6 | length 4211
  Top Layer w6: P1.2@925,1496 925,1455.51 928.51,1452 940.46,1452 1002,1390.46 1002,1317 935,1250 935,1210 960.53,1184.47 1325.74,1184.47 1329.58,1188.31 U1.101@1364.8,1188.31 1397.3,1188.31 cw(c1397.3,1181.75) 1401.94,1186.39 ccw(c1406.58,1191.03) 1406.58,1184.46 1406.7,1184.47 cw(c1406.7,1110.09) 1429.58,1180.86 cw(c1406.7,1110.09) 1459.29,1162.68 ; 1483.91,1138.06 1479.56,1142.41 ; v1(1498,1090) ccw(c1488.93,1090) 1495.35,1096.41 1494.12,1097.64 cw(c1503.49,1107) 1490.24,1107 1490.24,1116.62 ccw(c1453.77,1116.62) 1479.56,1142.41 ; 1459.29,1162.68 1479.56,1142.41 ; 1459.29,1162.68 1479.56,1142.41
  Bottom Layer w6: v1(1498,1090) cw(c1490.1,1090) 1495.68,1084.41 ccw(c1509.99,1070.11) 1489.76,1070.11 1489.76,1035.49 1490,1035.25 1490,1022.36 cw(c1378.14,1022.36) 1457.24,943.27 1331.63,817.66 ccw(c1357.28,792) 1321,792 1321,379.42 ccw(c1421,379.42) 1350.29,308.71 1436,223 1808.76,223 ccw(c1808.76,233.24) 1816,226 1823,233 1907.06,233 cw(c1907.06,221.08) 1915.49,229.51 ccw(c1923.96,237.98) 1923.96,226 3144.34,226 ccw(c3144.34,326) 3209.45,250.1 ccw(c3144.34,326) 3215.05,255.29 3282.88,323.12 ccw(c3268.11,337.89) 3289,337.89 3289,386.15 cw(c3370.64,386.15) 3312.91,443.88 3317.51,448.49 3346,477 ccw(c3336.34,486.66) 3350,486.66 3350,506.03 cw(c3361.92,506.03) 3353.49,514.46 3365.89,526.86 cw(c3387.95,504.81) 3387.95,536 3398.19,536 3400.62,538.43 3409.7,538.43 3413.21,541.95 3413.21,571.21 U2.6@3424,582
UART_RTS: C19.2 R16.1 U1.97 U7.4 | length 1639.3
  Top Layer w8: U7.4@249.39,1345 269.39,1365 v1(330,1365) ; R16.1@875,1085.08 923.08,1085.08 ; v1(941,1110) 941,1103 923.08,1085.08 ; C19.2@1020,1085.08 923.08,1085.08 ; v1(1075,1295) 1160,1295 1187.95,1267.05 U1.97@1364.8,1267.05
  Bottom Layer w8: v1(330,1365) 415,1365 609,1171 783,1171 907,1295 963.03,1295 ; v1(941,1110) 941,1270.97 940,1271.97 963.03,1295 ; v1(1075,1295) 963.03,1295
USB_UART_N: U5.A6 U5.B6 U7.1 | length 790.6
  Top Layer w6: U7.1@249.39,1495 267.8,1495 276.48,1486.31 276.48,1479.51 280,1476 334.97,1476 372,1438.97 372,1338 472,1238 472,1095.03 440.69,1063.72 388.59,1063.72 385.01,1060.14 371.56,1060.14 370.62,1059.2 351.31,1059.2 U5.A6@348.41,1056.3 U5.A6@370.62,1056.3 ; U5.B6@348.41,1016.93 389.43,1016.93 400,1027.5 400,1035 378.7,1056.3
USB_UART_P: U5.A7 U5.B7 U7.2 | length 754
  Top Layer w6: U7.2@249.39,1445 267.8,1445 276.48,1453.69 276.48,1460.49 280,1464 330,1464 360,1434 360,1333.03 460,1233.03 460,1100 435.72,1075.72 383.62,1075.72 380.04,1072.14 371.56,1072.14 370.62,1073.08 351.31,1073.08 U5.B7@348.41,1075.99 310.99,1075.99 300,1065 300,1055 318.39,1036.61 U5.A7@348.41,1036.61
VBAT: H2.23 U1.6 | length 3236.2
  Top Layer w8: U1.6@2215.2,1148.94 2581.06,1148.94 2740,990 v1(3271,990) ; H2.23@3410,2415 3360,2365 3360,2260 3624,1996 v1(3645,1996)
  Bottom Layer w8: v1(3271,990) 3293,990 3312.5,1009.5 3312.5,1034.5 3365,1087 3550.4,1087 3632.9,1169.5 3743.5,1169.5 3815,1241 3815,1922.43 3742.43,1995 3736.77,1995 3735.77,1996 v1(3645,1996)
VCC3V3: C4.2 C5.1 C6.1 C7.2 C8.1 C9.2 C10.1 C11.1 C14.2 C15.2 C16.2 C17.2 C18.1 C22.2 C26.2 C27.2 C31.2 C33.2 FPC1.9 FPC1.10 H2.6 H2.7 Key1.1 Key2.2 R1.2 R5.1 R7.2 R8.2 R9.2 R10.2 R11.2 R12.2 R13.2 R14.2 R16.2 R19.1 R21.1 R23.1 R26.2 TP3.1 U1.17 U1.30 U1.32 U1.33 U1.39 U1.52 U1.62 U1.72 U1.84 U1.95 U1.108 U1.121 U1.131 U1.144 U3.4 U4.8 U6.3 U6.7 U6.8 U7.5 U7.8 U8.5 U9.11 U9.33 U10.5 U11.5 | length 6775.2
  Top Layer w12: U11.5@199.39,585 199.39,756.63 C33.2@194.92,761.1 194.92,799.92 213.09,818.09 233.09,818.09 v1(235,820) ; C17.2@470.04,1616.1 470.04,1502.76 462.28,1495 U7.8@460.61,1495 415,1495 405,1485 405,1376.3 438.75,1342.55 502.45,1342.55 v1@529.41,1315.59 ; C31.2@475,2165 475,2043.9 558.9,1960 723,1960 810,1960 851.49,2001.49 U8.5@851.49,2051.25 901.25,2051.25 925,2075 v1(925,2110) ; v1(527,1317.5) 528.91,1315.59 v1@529.41,1315.59 ; v1(580,1885) U10.5@654.39,1885 U10.5@649.39,1880 ; v1(589,729) 614.15,729 638.15,705 C15.2@660,705 ; C16.2@611.53,1230.39 611.53,1236.5 532.44,1315.59 v1@529.41,1315.59 ; R14.2@660,875.08 R13.2@764,875.08 R12.2@868,875.08 R9.2@972,875.08 R8.2@1076,875.08 R7.2@1180,875.08 v1(1274.92,875.08) v1@1275,875 ; R16.2@875,1015 v1(940,1015) ; U3.4@1023.66,661.78 v1(1023.66,728.66) v1@1025,730 ; v1(1265,1040) 1275.51,1050.51 U1.108@1364.8,1050.51 ; v1(1275,1525) 1276.56,1523.44 1364.31,1523.44 U1.84@1364.8,1522.95 ; v1(1280,1310) 1282.71,1310 1286.29,1306.42 U1.95@1364.8,1306.42 ; v1(1430.72,282) 1430.72,238.28 1454,215 U6.3@1499.39,215 ; v1(1440,1895) 1445.51,1889.49 U1.72@1445.51,1820.2 ; v1(1560.78,416.93) 1562.71,415 1567.71,420 C18.1@1639.92,420 ; U1.62@1642.36,1820.2 1642.36,1892.36 v1(1645,1895) ; C18.1@1644.92,425 C18.1@1639.92,420 ; v1(1680,1064.23) 1680,1058.46 1681.73,1056.73 U1.121@1681.73,969.8 ; U6.7@1738.86,265 1738.86,315 1722.07,315 1713.04,324.04 1685.97,324.04 1639.92,370.08 C18.1@1639.92,420 ; U1.52@1839.21,1820.2 1839.21,1899.21 v1(1850,1910) ; v1(1875,855) 1878.58,858.58 U1.131@1878.58,969.8 ; v1(1895,200) 1895,196.21 1921.21,170 R11.2@1964.92,170 ; R11.2@1964.92,163.9 R11.2@1964.92,170 ; C14.2@1964.92,380 R11.2@1964.92,170 ; U1.39@2095.12,1820.2 2095.12,1880.12 2106,1891 v1(2130,1891) ; v1(2115,325) 2142.36,352.36 U4.8@2170,352.36 ; v1(2128,1371) 2133.53,1365.47 U1.17@2215.2,1365.47 ; U1.144@2134.49,969.8 2134.49,855.51 v1(2135,855) ; U1.30@2215.2,1621.38 2155.62,1621.38 2141,1636 v1(2141,1709) 2169.08,1680.92 2214.71,1680.92 U1.33@2215.2,1680.43 U1.32@2215.2,1660.75 ; v1(2395,555) 2424.02,555 2464.92,514.1 R5.1@2464.92,508 R19.1@2464.92,392 R21.1@2464.92,276 R23.1@2464.92,160 ; v1(2740,675) R1.2@2740,740 ; v1(3061,1246) 3072,1235 C26.2@3114.92,1235 3114.92,1241.1 3131.76,1257.94 3137.86,1257.94 3159.25,1279.33 U9.33@3159.25,1322.34 ; Key1.1@3098.38,513.46 3128.54,513.46 3149.09,492.91 3149.09,457.91 v1(3151,456) 3151,407 3132.24,388.24 Key2.2@3100.22,388.24 ; U9.11@3190.75,1767.66 3190.75,1792.51 3219.5,1821.26 3232.36,1821.26 3280,1868.9 C27.2@3280,1875 3314,1875 v1(3326,1863) ; R26.2@3418.08,2016 v1(3481,2016) ; v1(3677,1452) 3692.36,1467.36 FPC1.9@3734.31,1467.36 FPC1.10@3734.31,1487.05
  Bottom Layer w12: 1264.96,1624.96 1245,1605 1245,1555 v1(1275,1525) ; 1264.96,1625 C6.1@1294.92,1625 ; v1(1265,1040) 1266.91,1038.09 1266.91,993.09 1285,975 C4.2@1314.92,975 ; v1(1280,1310) 1270.94,1310 1242.29,1338.65 1242.29,1367.29 1250,1375 C7.2@1300,1375 ; v1(1645,1895) 1744.92,1895 C5.1@1745,1895.08 ; v1(1680,1064.23) 1719.23,1064.23 1740,1043.46 C9.2@1740,995.08 ; v1(1850,1910) 1883.9,1910 1918.9,1875 C11.1@1925,1875 ; v1(1875,855) 1905,855 1915,865 C8.1@1915,915 ; v1(2130,1891) 2130,1910 2105,1935 2105,2010 2130,2035 C10.1@2155,2035
  other v1: 2849,699
X1_N: C1.2 U1.23 X1.2 | length 557.5
  Top Layer w6: U1.23@2215.2,1483.58 2250.42,1483.58 2254.26,1487.43 2314.97,1487.43 2357,1529.45 2357,1555 2372,1570 2435,1570 2445,1560 ; X1.2@2445,1484.29 2445,1560 ; C1.2@2600,1535 C1.2@2585,1520 2585,1552.99 2581.49,1556.5 2448.5,1556.5 2445,1560
X1_P: C2.2 U1.24 X1.1 | length 559.5
  Top Layer w6: U1.24@2215.2,1503.27 2250.42,1503.27 2254.26,1499.43 2310,1499.43 2345,1534.43 2345,1559.97 2367.03,1582 2435,1582 2440,1587 ; X1.1@2445,1645.71 2445,1592 2440,1587 ; C2.2@2600,1590 C2.2@2585,1605 2585,1572.01 2581.49,1568.5 2453.47,1568.5 2440,1581.97 2440,1587
  Top Layer w8: X1.1@2435.16,1645.71 X1.1@2445,1645.71
pads on no net: Key1.2 Key1.4 Key2.1 Key2.3 LED3.2 Reset1.1 Reset1.3 U5.A5 U5.A8 U5.B5 U5.B8

## Polygon pours and split planes (outlines as drawn)
GND on Bottom Layer (solid, pour order 20): 2632.73,2537.46 184.67,2538.02 115.37,2511.66 32,2405.68 31,152.75 45.61,95.31 95.88,28.29 173.7,-17.98 3837.98,-23.11 3952.66,91.57 3952.66,153.22 3951.41,154.47 3949.78,2418.04 3883.49,2504.42 3836.95,2523.7 3825.57,2528.42 3795.76,2536.41
VCC3V3 on Top Layer (solid, pour order 22): 207.68,2538.01 125.99,2512.83 32,2405.68 39.35,78.29 148.17,-17.96 3840.33,-20.54 3951.41,90.53 3951.4,1726.71 3949.03,2403.43 3844.49,2536.41 3789.54,2536.41
GND on GND02 (split plane): 3797.83,2515.05 3819.09,2509.35 3839.43,2500.92 3858.49,2489.92 3875.95,2476.52 3891.52,2460.95 3904.92,2443.49 3915.92,2424.43 3924.35,2404.09 3930.05,2382.83 3932.92,2361.01 3932.92,2350 3932.92,166.23 3932.88,165.94 3932.6,155.03 3929.28,133.61 3923.25,112.8 3914.59,92.94 3903.45,74.36 3890.01,57.37 3874.5,42.24 3857.18,29.23 3838.33,18.55 3818.27,10.39 3797.32,4.87 3775.83,2.08 215.43,2.08 215.01,2.14 204.38,2.48 183.56,5.74 163.33,11.58 143.98,19.9 125.83,30.58 109.15,43.43 94.2,58.27 81.23,74.86 70.43,92.94 61.98,112.23 56,132.43 52.59,153.21 52.2,163.73 52.1,164.47 52.08,225.01 52.08,2350 52.08,2361.01 54.95,2382.83 60.65,2404.09 69.08,2424.43 80.08,2443.49 93.48,2460.95 109.05,2476.52 126.51,2489.92 145.57,2500.92 165.91,2509.35 187.17,2515.04 208.99,2517.92 220,2517.92 3764.98,2517.92 3776.01,2517.92
VCC3V3 on PWR03 (split plane): 3793.92,2495.4 3812.65,2490.38 3830.57,2482.96 3847.36,2473.26 3862.75,2461.46 3876.46,2447.75 3888.26,2432.36 3897.96,2415.57 3905.38,2397.65 3910.4,2378.92 3912.93,2359.7 3912.93,2350 3912.93,166.78 3912.9,166.45 3912.65,156.82 3909.73,137.94 3904.41,119.61 3896.78,102.12 3886.97,85.75 3875.13,70.78 3861.47,57.45 3846.21,45.99 3829.6,36.58 3811.93,29.39 3793.47,24.52 3774.54,22.07 216.11,22.07 215.65,22.12 206.26,22.42 187.9,25.3 170.07,30.44 153.03,37.77 137.04,47.17 122.34,58.5 109.18,71.57 97.75,86.19 88.24,102.12 80.79,119.11 75.52,136.9 72.52,155.21 72.17,164.48 72.09,165.25 72.09,165.92 72.07,225.01 72.07,2350 72.07,2359.7 74.6,2378.92 79.62,2397.65 87.04,2415.57 96.74,2432.36 108.54,2447.75 122.25,2461.46 137.64,2473.26 154.43,2482.96 172.35,2490.38 191.08,2495.4 210.3,2497.93 220,2497.93 3764.98,2497.93 3774.7,2497.93

## Other copper
Top Layer:
  text "Top Layer" at 140,2670 h100
Bottom Layer:
  text "Bottom Layer" at 1260,2670 h100
GND02 (plane layer: these items are gaps in the copper):
  text "Gnd" at 670,2675 h100
PWR03 (plane layer: these items are gaps in the copper):
  text "Pwr" at 970,2675 h100

## Silkscreen, mask and mechanical layers (free items; w line width, h text height)
Top Overlay:
  text "PB10" at 1745,2225 h40
  text "PC4" at 1850,2225 h40
  text "PA6" at 1950,2225 h40
  text "PA4" at 2050,2225 h40
  text "+5V" at 2155,2225 h40
  text "PA2" at 2385,2225 h40
  text "PA0" at 2485,2225 h40
  text "PC2" at 2580,2225 h40
  text "PC0" at 2685,2225 h40
  text "PF7" at 2770,2225 h40
  text "GND" at 2871.25,2225 h40
  text "GND" at 2975,2225 h40
  text "+5V" at 3080,2225 h40
  text "+5V" at 3185,2225 h40
  text "PC14" at 3275,2225 h40
  text "VBAT" at 3380,2225 h40
  text "PE5" at 3490,2225 h40
  text "PC6" at 1050,2220 h40
  text "PG7" at 1150,2220 h40
  text "PA15" at 1245,2220 h40
  text "PD6" at 1350,2220 h40
  text "PG9" at 1445,2220 h40
  text "PG13" at 1550,2220 h40
  text "PB6" at 1655,2220 h40
  text "PA5" at 1950,2190 h40
  text "PG14" at 2050,2190 h40
  text "GND" at 2150,2190 h40
  text "PF8" at 2685,2190 h40
  text "PF6" at 2760,2190 h40
  text "3V3" at 2980,2190 h40
  text "GND" at 3085,2190 h40
  text "GND" at 3185,2190 h40
  text "PC13" at 3275,2190 h40
  text "PE6" at 3390,2190 h40
  text "PE4" at 3490,2190 h40
  text "3V3" at 2874.25,2187 h40
  text "PD7" at 1350,2185 h40
  text "PG11" at 1440,2185 h40
  text "PG15" at 1550,2185 h40
  text "PB7" at 1655,2185 h40
  text "PC5" at 1750,2185 h40
  text "PA7" at 1850,2185 h40
  text "PA1" at 2385,2185 h40
  text "PC3" at 2485,2185 h40
  text "PC1" at 2580,2185 h40
  text "PG8" at 1050,2180 h40
  text "PG6" at 1150,2180 h40
  text "PD3" at 1250,2180 h40
  text "RX" at 1004,1481 h40
  text "TX" at 1000,1373 h40
  text "GND/5V0" at 2946,1042 h40
  text "UART2R/T" at 2946,981 h40
  text "BOARD --> V3.6 --> 2025/08/17" at 2316,924 h40
  text "RST/TCK" at 2946,917 h40
  text "TMS/GND" at 2946,854.5 h40
  text "UARTR/T" at 2946,792 h40
  text "CAN2H/L" at 2946,729.5 h40
  text "CAN1L/H" at 2946,667 h40
Mechanical 1:
  lines w6: 35,163.86 35,225 35,2350 cw(c220,2350) 220,2535 3765,2535 cw(c3765,2350) 3950,2350 3950,165.93 ; 35,170 ccw(c220,170) 220,-15 ; 215,-15 3765,-15 ccw(c3765,170) 3950,170
Drill Drawing:
  text ".legend" at 4200,1385 h40

## Text inside footprints (layer, text, board x,y; h text height)
P1: Top Overlay "USB" at 947,1567 h40; Top Overlay "PIN" at 819,1568 h40